# Altium PCB 4_Lay_PCB.PcbDoc (part 2 of 2)
Units mm, origin at the board's own origin, x right, y up, seen from the top; angles counter-clockwise.
Board outline 51.1 x 75.4 mm, 4 copper layers (Top, Signal Layer 1, Signal Layer 2, Bottom), stack 1.641 mm thick; 181 components, 104 nets, 542 pads, 589 vias.
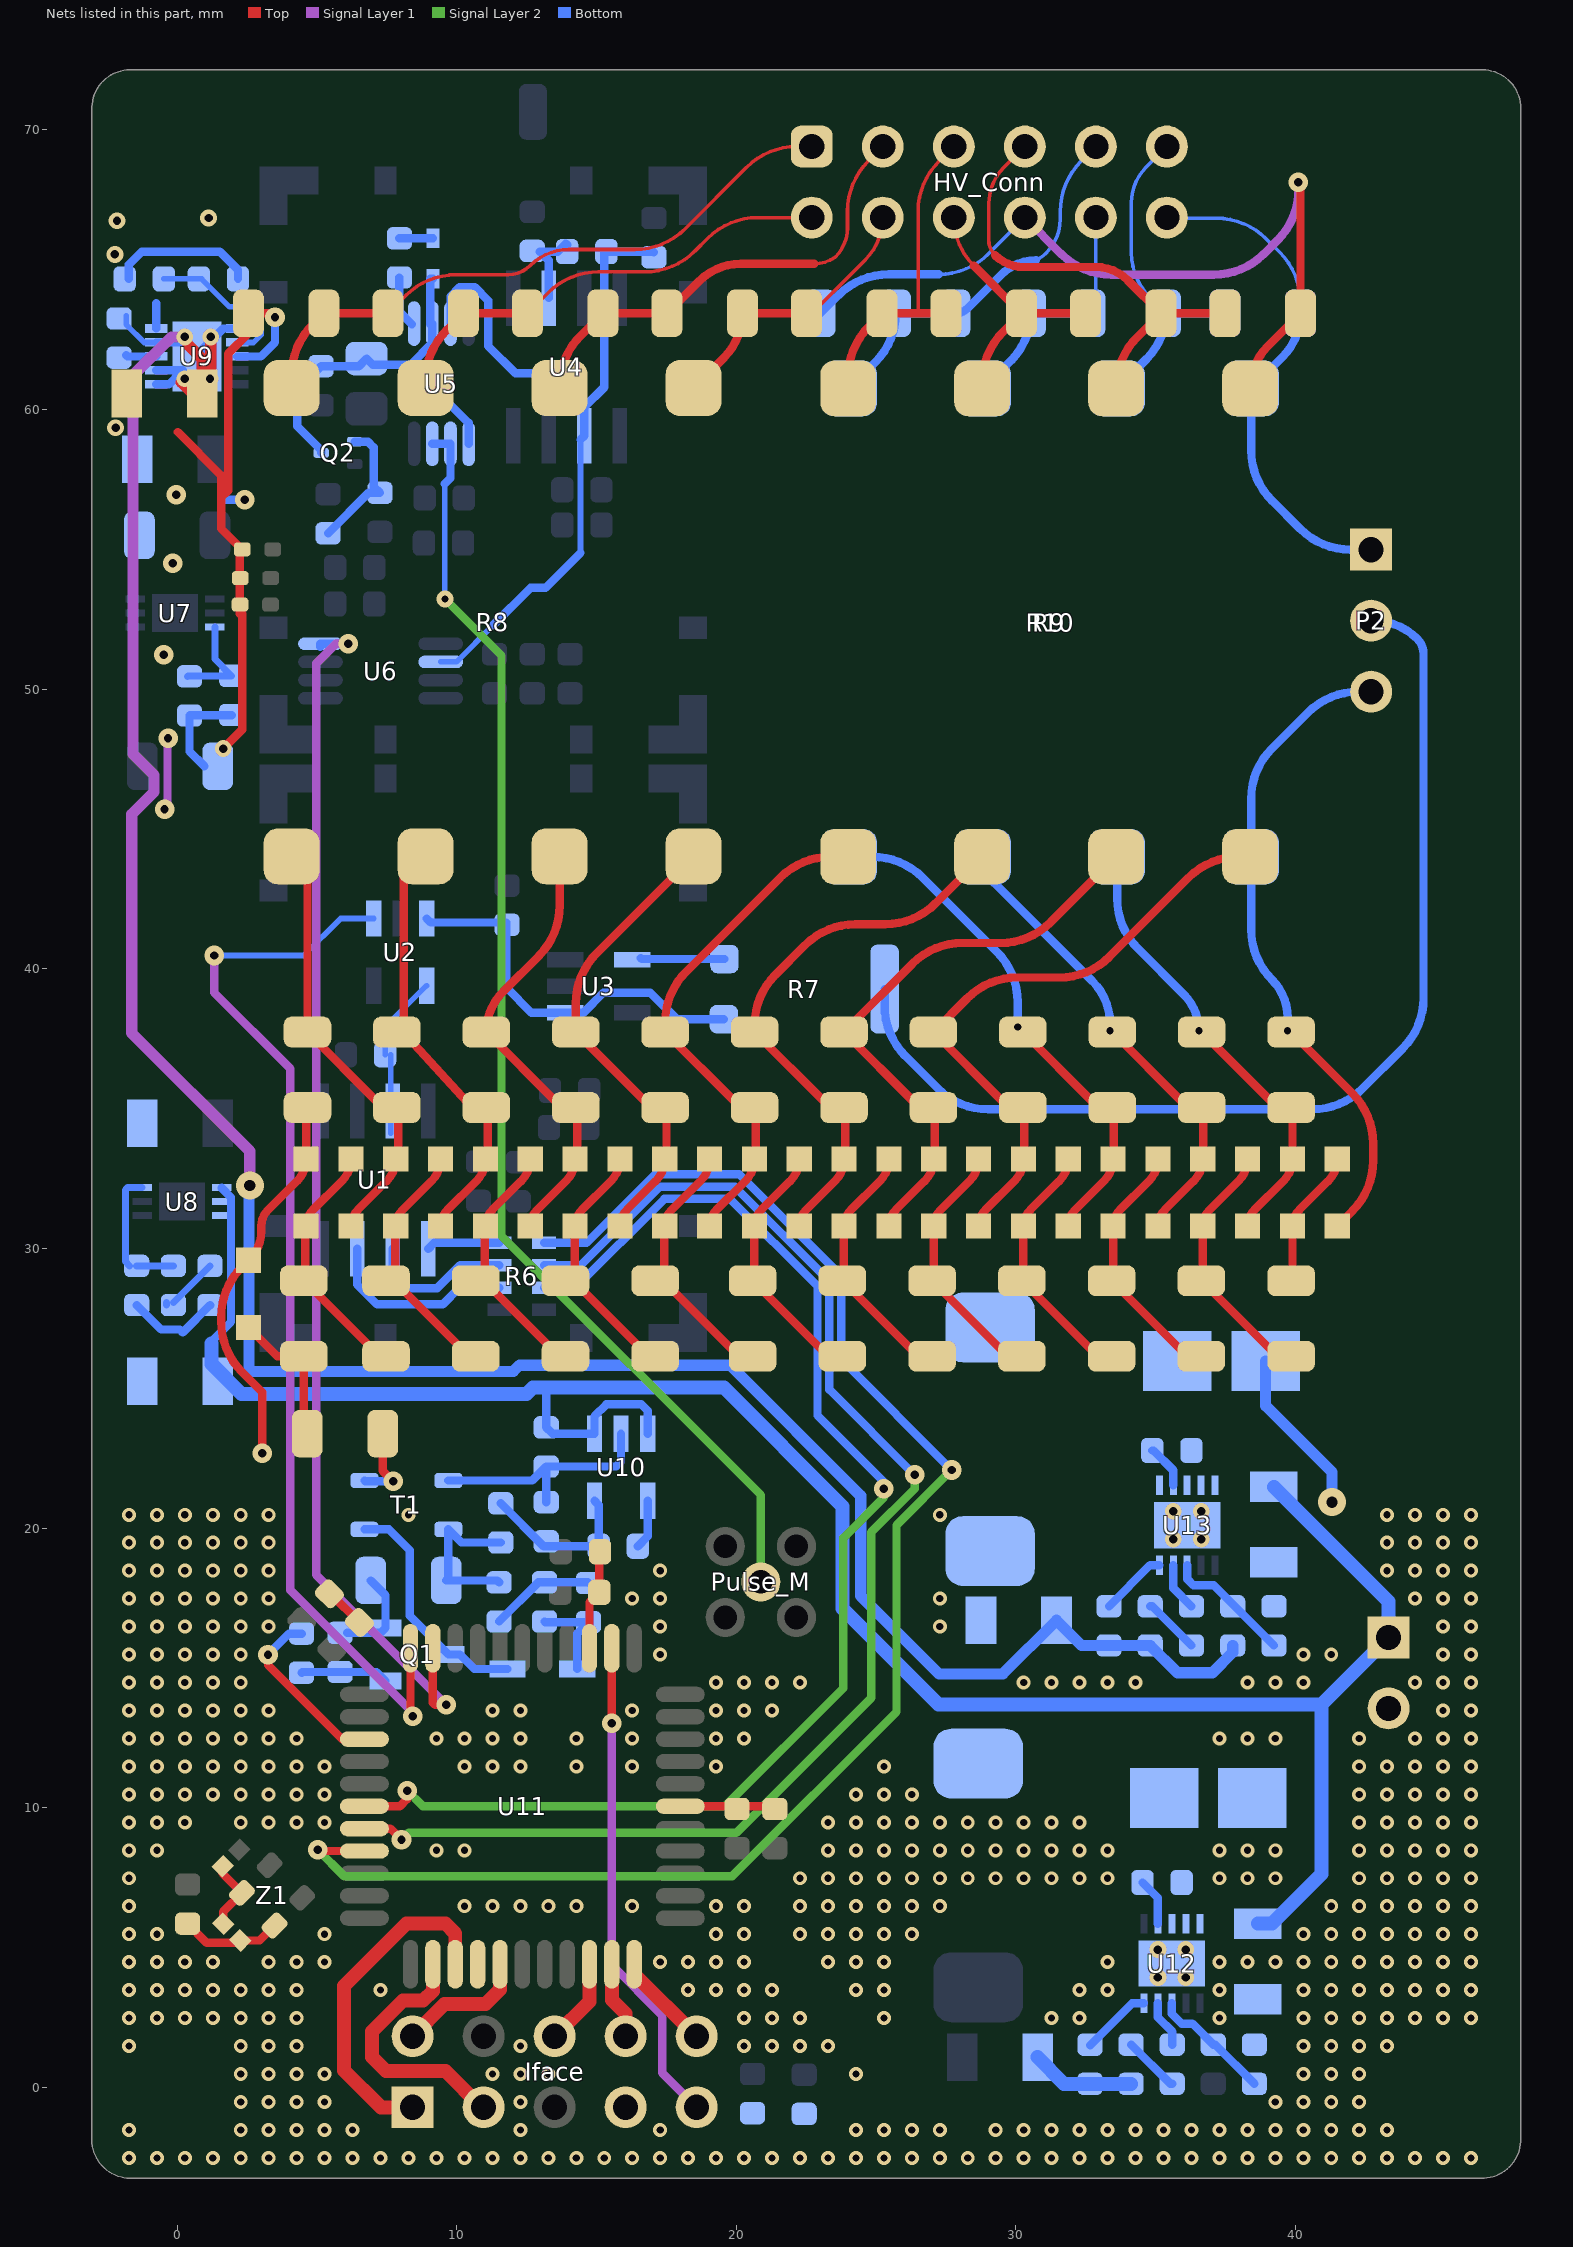
[diagram p4: the nets of this part, all layers, seen from the top]

## Via types
v1: diameter 0.5, hole 0.256, Top to Bottom, tented both sides, 495 vias
v2: diameter 0.7, hole 0.3, Top to Bottom, tented both sides, 35 vias
v3: diameter 0.6, hole 0.3, Top to Bottom, tented both sides, 29 vias
v4: diameter 0.6, hole 0.3, Top to Bottom, 12 vias
v5: diameter 0.6, hole 0.254, Top to Bottom, tented both sides, 9 vias
v6: diameter 1, hole 0.4, Top to Bottom, tented both sides, 4 vias
v7: diameter 3.7, hole 3, Top to Bottom, 3 vias
v8: diameter 1.2, hole 0.5, Top to Bottom, tented both sides, 1 vias
v9: diameter 3.6, hole 3, Top to Bottom, 1 vias

## Nets (pads, with @x,y where several pads share a name; then routed paths per layer and width w, separated by ;. In a path a pad name is that pad's centre, name@x,y a point inside that pad or via, vN(x,y) a via of type N, cw(c..) or ccw(c..) an arc to the next point about the centre after c; other vN are vias at no path point) (continued)
GND: Batt.2 C2.2 C3.2 C18.2 C31.2 C54.2 C55.2 C56.2 C57.2 C58.2 C59.2 C60.2 C61.2 C62.2 C64.2 C65.2 C66.2 C67.2 C68.2 C69.2 C70.2 C72.2 C73.2 C74.2 C76.2 C77.1 C79.2 C80.2 C81.2 D2.1 D3.2 D30.1 Iface.7 Jumper1.1 Jumper2.1 Jumper.1 L2.2 Q1.2 R5.1 R19.2 R21.1 R23.1 R26.1 R27.1 R29.2 R32.1 T1.2 U9.5 U9.8 U10.2 U11.4 U11.17 U11.25 U12.11 U13.1 Z1.2 | length 81.9
  Top w0.3: 0.025,59.2 1.575,57.65 1.575,56.85 ; C79.2@0.375,5.85 1.058,5.167 2.251,5.167 R32.1@2.251,5.249 2.949,5.249 Z1.2@3.485,5.785 ; v3(1.65,47.875) 2.33,48.555 2.33,52.698 2.243,52.698 2.243,53.975 2.243,54.913 Jumper1.1@2.33,55 2.323,55 1.575,55.748 1.575,56.85 ; D2.1@2.55,29.575 2.319,29.344 ccw(c4.115,27.548) 1.575,27.548 1.575,27.377 ccw(c4.115,27.377) 2.319,25.581 3.05,24.85 v2(3.05,22.676) ; D2.1@2.575,29.575 ccw(c1.522,30.627) 3.011,30.627 3.011,30.8 cw(c3.816,30.8) 3.247,31.369 4.287,32.409 ccw(c3.496,33.2) D3.2@4.614,33.2 4.614,34.825 cw(c4.614,35.282) C18.2@4.291,34.959 ; v2(3.5,63.303) 3.5,63.425 3.486,63.439 C31.2@2.55,63.439 2.55,62.725 1.823,61.998 1.823,57.098 1.575,56.85 ; C67.2@5.445,17.647 5.495,17.647 C68.2@6.52,16.622 ; U11.25@14.746,15.7 14.746,17.348 C66.2@15.1,17.702 15.1,19.127 C65.2@15.125,19.152 ; U11.17@17.996,10.05 21.277,10.05 C69.2@21.375,9.952
  Signal Layer 1 w0.3: v2(-0.45,45.7) -0.346,45.804 -0.346,48.231 v2(-0.325,48.252)
  Bottom w0.3: R23.1@-1.725,64.675 -1.725,65.188 -1.263,65.65 1.525,65.65 2.175,65 C61.2@2.175,64.675 ; C58.2@-1.447,27.974 -0.573,27.1 0.097,27.1 0.2,26.997 R21.1@1.178,27.974 ; U9.5@-0.746,62.9 -0.746,63.804 ; C3.2@0.973,47.244 0.443,47.774 R19.2@0.443,49.059 0.459,49.075 C55.2@1.95,49.075 ; 1.575,56.85 1.651,56.774 v2(2.425,56.774) v2@2.483,56.774 ; U9.8@2.15,61.9 2.994,61.9 3.5,62.406 v2(3.5,63.303) ; R5.1@6.079,16.253 7.279,16.253 Q1.2@7.454,16.428 7.454,17.596 C2.2@6.925,18.125 ; T1.2@9.7,21.7 12.7,21.7 C62.2@13.2,22.2 ; C64.2@13.2,20.925 C62.2@13.2,22.2 ; U10.2@15.875,23.375 15.875,22.375 15.7,22.2 C62.2@13.2,22.2
  Bottom w0.5: C74.2@30.775,1.075 31.725,0.125 R27.1@32.65,0.125 C73.2@34.119,0.125
  other v1: -1.725,-2.525 -0.725,-2.525 0.275,-2.525 1.275,-2.525 2.275,-2.525 3.275,-2.525 4.275,-2.525 5.275,-2.525 6.275,-2.525 7.275,-2.525 8.275,-2.525 9.275,-2.525 10.275,-2.525 11.275,-2.525 12.275,-2.525 13.275,-2.525 14.275,-2.525 15.275,-2.525 16.275,-2.525 17.275,-2.525 18.275,-2.525 19.275,-2.525 20.275,-2.525 21.275,-2.525 22.275,-2.525 23.275,-2.525 24.275,-2.525 25.275,-2.525 26.275,-2.525 27.275,-2.525 28.275,-2.525 29.275,-2.525 30.275,-2.525 31.275,-2.525 32.275,-2.525 33.275,-2.525 34.275,-2.525 35.275,-2.525 36.275,-2.525 37.275,-2.525 38.275,-2.525 39.275,-2.525 40.275,-2.525 41.275,-2.525 42.275,-2.525 43.275,-2.525 44.275,-2.525 45.275,-2.525 46.275,-2.525 -1.725,-1.525 2.275,-1.525 3.275,-1.525 4.275,-1.525 5.275,-1.525 6.275,-1.525 12.275,-1.525 17.275,-1.525 24.275,-1.525 25.275,-1.525 26.275,-1.525 27.275,-1.525 29.275,-1.525 30.275,-1.525 31.275,-1.525 32.275,-1.525 33.275,-1.525 34.275,-1.525 35.275,-1.525 36.275,-1.525 37.275,-1.525 38.275,-1.525 39.275,-1.525 40.275,-1.525 41.275,-1.525 42.275,-1.525 43.275,-1.525 2.275,-0.525 3.275,-0.525 4.275,-0.525 5.275,-0.525 12.275,-0.525 39.275,-0.525 40.275,-0.525 41.275,-0.525 42.275,-0.525 2.275,0.475 3.275,0.475 4.275,0.475 5.275,0.475 11.275,0.475 12.275,0.475 13.275,0.475 24.275,0.475 40.275,0.475 41.275,0.475 42.275,0.475 -1.725,1.475 2.275,1.475 3.275,1.475 4.275,1.475 12.275,1.475 20.275,1.475 21.275,1.475 22.275,1.475 23.275,1.475 40.275,1.475 41.275,1.475 42.275,1.475 43.275,1.475 -1.725,2.475 -0.725,2.475 0.275,2.475 1.275,2.475 2.275,2.475 3.275,2.475 4.275,2.475 20.275,2.475 21.275,2.475 22.275,2.475 25.275,2.475 31.275,2.475 32.275,2.475 37.275,2.475 40.275,2.475 41.275,2.475 42.275,2.475 43.275,2.475 44.275,2.475 45.275,2.475 46.275,2.475 -1.725,3.475 -0.725,3.475 0.275,3.475 1.275,3.475 2.275,3.475 3.275,3.475 4.275,3.475 7.275,3.475 18.275,3.475 19.275,3.475 20.275,3.475 21.275,3.475 24.275,3.475 25.275,3.475 32.275,3.475 33.275,3.475 37.275,3.475 40.275,3.475 41.275,3.475 42.275,3.475 43.275,3.475 44.275,3.475 45.275,3.475 46.275,3.475 -1.725,4.475 -0.725,4.475 0.275,4.475 1.275,4.475 3.275,4.475 4.275,4.475 5.275,4.475 17.275,4.475 18.275,4.475 19.275,4.475 20.275,4.475 23.275,4.475 24.275,4.475 25.275,4.475 33.275,4.475 37.275,4.475 38.275,4.475 39.275,4.475 40.275,4.475 41.275,4.475 42.275,4.475 43.275,4.475 44.275,4.475 45.275,4.475 46.275,4.475 -1.725,5.475 -0.725,5.475 5.275,5.475 19.275,5.475 20.275,5.475 22.275,5.475 23.275,5.475 24.275,5.475 25.275,5.475 26.275,5.475 40.275,5.475 41.275,5.475 42.275,5.475 43.275,5.475 44.275,5.475 45.275,5.475 46.275,5.475 -1.725,6.475 10.275,6.475 11.275,6.475 12.275,6.475 13.275,6.475 14.275,6.475 16.275,6.475 19.275,6.475 20.275,6.475 22.275,6.475 23.275,6.475 24.275,6.475 25.275,6.475 26.275,6.475 27.275,6.475 41.275,6.475 42.275,6.475 43.275,6.475 44.275,6.475 45.275,6.475 46.275,6.475 -1.725,7.475 22.275,7.475 23.275,7.475 24.275,7.475 25.275,7.475 26.275,7.475 27.275,7.475 28.275,7.475 29.275,7.475 30.275,7.475 31.275,7.475 32.275,7.475 33.275,7.475 37.275,7.475 38.275,7.475 39.275,7.475 42.275,7.475 43.275,7.475 44.275,7.475 45.275,7.475 46.275,7.475 -1.725,8.475 -0.725,8.475 9.275,8.475 10.275,8.475 23.275,8.475 24.275,8.475 25.275,8.475 26.275,8.475 27.275,8.475 28.275,8.475 29.275,8.475 30.275,8.475 31.275,8.475 32.275,8.475 33.275,8.475 37.275,8.475 38.275,8.475 39.275,8.475 42.275,8.475 43.275,8.475 44.275,8.475 45.275,8.475 46.275,8.475 -1.725,9.475 -0.725,9.475 0.275,9.475 2.275,9.475 3.275,9.475 4.275,9.475 5.275,9.475 23.275,9.475 24.275,9.475 25.275,9.475 26.275,9.475 27.275,9.475 28.275,9.475 29.275,9.475 30.275,9.475 31.275,9.475 32.275,9.475 42.275,9.475 43.275,9.475 44.275,9.475 45.275,9.475 46.275,9.475 -1.725,10.475 -0.725,10.475 0.275,10.475 1.275,10.475 2.275,10.475 3.275,10.475 4.275,10.475 5.275,10.475 24.275,10.475 25.275,10.475 26.275,10.475 42.275,10.475 43.275,10.475 44.275,10.475 45.275,10.475 46.275,10.475 -1.725,11.475 -0.725,11.475 0.275,11.475 1.275,11.475 2.275,11.475 3.275,11.475 4.275,11.475 5.275,11.475 10.275,11.475 11.275,11.475 12.275,11.475 14.275,11.475 16.275,11.475 19.275,11.475 25.275,11.475 42.275,11.475 43.275,11.475 44.275,11.475 45.275,11.475 46.275,11.475 -1.725,12.475 -0.725,12.475 0.275,12.475 1.275,12.475 2.275,12.475 3.275,12.475 4.275,12.475 9.275,12.475 10.275,12.475 11.275,12.475 12.275,12.475 14.275,12.475 16.275,12.475 19.275,12.475 20.275,12.475 37.275,12.475 38.275,12.475 39.275,12.475 42.275,12.475 44.275,12.475 45.275,12.475 46.275,12.475 -1.725,13.475 -0.725,13.475 0.275,13.475 1.275,13.475 2.275,13.475 3.275,13.475 11.275,13.475 12.275,13.475 16.275,13.475 19.275,13.475 20.275,13.475 21.275,13.475 45.275,13.475 46.275,13.475 -1.725,14.475 -0.725,14.475 0.275,14.475 1.275,14.475 2.275,14.475 19.275,14.475 20.275,14.475 21.275,14.475 22.275,14.475 30.275,14.475 31.275,14.475 32.275,14.475 33.275,14.475 34.275,14.475 38.275,14.475 39.275,14.475 40.275,14.475 44.275,14.475 45.275,14.475 46.275,14.475 -1.725,15.475 -0.725,15.475 0.275,15.475 1.275,15.475 2.275,15.475 17.275,15.475 40.275,15.475 41.275,15.475 45.275,15.475 46.275,15.475 -1.725,16.475 -0.725,16.475 0.275,16.475 1.275,16.475 2.275,16.475 3.275,16.475 17.275,16.475 27.275,16.475 45.275,16.475 46.275,16.475 -1.725,17.475 -0.725,17.475 0.275,17.475 1.275,17.475 2.275,17.475 3.275,17.475 16.275,17.475 17.275,17.475 27.275,17.475 44.275,17.475 45.275,17.475 46.275,17.475 -1.725,18.475 -0.725,18.475 0.275,18.475 1.275,18.475 2.275,18.475 3.275,18.475 17.275,18.475 43.275,18.475 44.275,18.475 45.275,18.475 46.275,18.475 -1.725,19.475 -0.725,19.475 0.275,19.475 1.275,19.475 2.275,19.475 3.275,19.475 43.275,19.475 44.275,19.475 45.275,19.475 46.275,19.475 -1.725,20.475 -0.725,20.475 0.275,20.475 1.275,20.475 2.275,20.475 3.275,20.475 8.275,20.475 27.275,20.475 43.275,20.475 44.275,20.475 45.275,20.475 46.275,20.475
  other v2: -0.475,51.225 -0.15,54.5 -0.025,56.95
  other v3: -2.2,59.35 -2.225,65.55 -2.15,66.75 1.125,66.85
  other v4: 35.075,3.925 36.075,3.925 35.075,4.925 36.075,4.925
MAXPULSELEVEL: Pulse_M.1 U5.6 U5.7 | length 46.1
  Signal Layer 2 w0.3: v5(9.575,53.225) 11.6,51.2 11.6,30.45 20.875,21.175 Pulse_M.1@20.875,18.075
  Bottom w0.2: v5(9.575,53.225) 9.575,57.35
  Bottom w0.3: U5.7@9.125,58.775 U5.6@9.775,58.775 9.775,57.55 9.575,57.35
MCU_CONTROL1: Iface.2 U11.5 | length 4.7
  Top w0.5: Iface.2@8.42,1.825 9.57,2.975 11.025,2.975 11.546,3.496 U11.5@11.546,4.4
MCU_CONTROL2: Iface.3 U11.2 | length 9.4
  Top w0.5: U11.2@9.146,4.4 9.146,3.446 8.8,3.1 8.075,3.1 6.975,2 6.975,1.075 7.475,0.575 9.6,0.575 10.89,-0.715 Iface.3@10.96,-0.715
MCU_CONTROL3: Iface.1 U11.3 | length 12.2
  Top w0.5: Iface.1@8.42,-0.715 7.29,-0.715 5.975,0.6 5.975,3.625 8.2,5.85 9.6,5.85 9.946,5.504 U11.3@9.946,4.4
NEGATIVE_V: C59.1 C77.2 C78.2 D31.1 R22.1 R30.1 R31.1 U9.1 U9.2 U9.4 U9.6 U9.11 U13.11 | length 100.9
  Top w0.4: v3@0.15,60.975 0.55,60.575 C59.1@0.9,60.575 0.9,61.8 ; 0.4,62.3 0.9,61.8 ; C59.1@1.025,60.7 C59.1@1.15,60.575 ; v3(1.2,62.6) 1.2,61.5 0.9,61.8
  Signal Layer 1 w0.4: v3@0.025,62.6 -0.2,62.6 -1.573,61.227 -1.573,47.68 -0.823,46.93 -0.823,46.327 -1.625,45.525 -1.625,37.7 2.6,33.475 v6(2.6,32.252)
  Bottom w0.2: R22.1@-1.825,63.35 -1.825,63.05 -1.175,62.4 U9.4@-0.746,62.4
  Bottom w0.3: U9.1@-0.746,60.9 -0.298,60.9 U9.11@0.089,61.286 ; U9.2@-0.746,61.4 U9.11@0.202,61.4 ; U9.4@-0.746,62.4 U9.11@0.202,62.4 ; U9.11@0.702,61.952 1.65,62.9 U9.6@2.15,62.9
  Bottom w0.4: v6@2.575,31.955 2.575,25.594 12.019,25.594 12.25,25.825 19.775,25.825 24.448,21.152 24.448,17.577 27.25,14.775 29.525,14.775 C77.2@31.45,16.7 32.35,15.8 R31.1@33.325,15.8 C78.2@34.8,15.8 35.775,14.825 37.025,14.825 37.75,15.55 R30.1@37.75,15.8 ; D31.1@38.925,25.975 38.925,24.375 41.3,22 v6(41.3,20.925)
  other v3: 0.275,61.1 1.175,61.1 0.275,62.6
  other v4: 35.625,19.6 36.625,19.6 35.625,20.6 36.625,20.6
NetC1_1: C1.1 D1.A R1.1 | length 3.4
  Bottom w0.3: R1.1@13.14,16.658 13.165,16.633 C1.1@14.715,16.633 14.315,16.233 D1.A@14.315,14.958
NetC1_2: C1.2 R1.2 R2.1 | length 3.8
  Bottom w0.3: R2.1@11.515,16.658 12.915,18.058 R1.2@13.14,18.058 14.69,18.058 C1.2@14.715,18.033
NetC2_1: C2.1 R2.2 R3.1 T1.1 | length 5.8
  Bottom w0.3: R2.2@11.515,18.058 11.448,18.125 C2.1@9.625,18.125 9.7,18.2 T1.1@9.7,19.95 10.167,19.483 R3.1@11.575,19.483
NetC4_2: C4.2 U1.7 U2.4 | length 5.9
  Bottom w0.2: C4.2@7.438,36.925 7.438,37.913 U2.4@8.925,39.4 ; U1.7@7.635,34.114 C4.2@7.635,36.925
NetC5_1: C5.1 C6.2 D2.2 | length 5.2
  Top w0.3: D2.2@2.55,27.175 3.577,26.148 C6.2@4.535,26.148 4.535,23.49 C5.1@4.65,23.375
NetC6_1: C6.1 C7.2 D3.1 D4.2 | length 8.6
  Top w0.3: C6.1@4.535,28.848 C7.2@7.235,26.148 ; C6.1@4.586,28.97 D3.1@4.586,30.8 ; D3.1@4.614,30.8 cw(c5.419,30.8) 4.85,31.369 5.89,32.409 ccw(c5.099,33.2) D4.2@6.218,33.2
NetC7_1: C7.1 C8.2 D5.1 D6.2 | length 8.6
  Top w0.3: C7.1@7.745,28.848 C8.2@10.445,26.148 ; C7.1@7.795,28.97 D5.1@7.795,30.8 ; D5.1@7.821,30.8 cw(c8.626,30.8) 8.057,31.369 9.097,32.409 ccw(c8.306,33.2) D6.2@9.424,33.2
NetC8_1: C8.1 C9.2 D7.1 D8.2 | length 8.6
  Top w0.3: C8.1@10.954,28.848 C9.2@13.654,26.148 ; C8.1@11.005,28.97 D7.1@11.005,30.8 ; D7.1@11.028,30.8 cw(c11.833,30.8) 11.264,31.369 12.304,32.409 ccw(c11.513,33.2) D8.2@12.631,33.2
NetC9_1: C9.1 C10.2 D9.1 D10.2 | length 8.6
  Top w0.3: C9.1@14.164,28.848 C10.2@16.864,26.148 ; C9.1@14.214,28.97 D9.1@14.214,30.8 ; D9.1@14.235,30.8 cw(c15.039,30.8) 14.47,31.369 15.51,32.409 ccw(c14.72,33.2) D10.2@15.838,33.2
NetC10_1: C10.1 C11.2 D11.1 D12.2 | length 8.6
  Top w0.3: C10.1@17.374,28.848 C11.2@20.074,26.148 ; C10.1@17.424,28.97 D11.1@17.424,30.8 ; D11.1@17.441,30.8 cw(c18.246,30.8) 17.677,31.369 18.717,32.409 ccw(c17.926,33.2) D12.2@19.045,33.2
NetC11_1: C11.1 C12.2 D13.1 D14.2 | length 8.6
  Top w0.3: C11.1@20.583,28.848 C12.2@23.283,26.148 ; C11.1@20.634,28.97 D13.1@20.634,30.8 ; D13.1@20.648,30.8 cw(c21.453,30.8) 20.884,31.369 21.924,32.409 ccw(c21.133,33.2) D14.2@22.251,33.2
NetC12_1: C12.1 C13.2 D15.1 D16.2 | length 8.6
  Top w0.3: C12.1@23.793,28.848 C13.2@26.493,26.148 ; C12.1@23.843,28.97 D15.1@23.843,30.8 ; D15.1@23.855,30.8 cw(c24.66,30.8) 24.091,31.369 25.131,32.409 ccw(c24.34,33.2) D16.2@25.458,33.2
NetC13_1: C13.1 C14.2 D17.1 D18.2 | length 8.6
  Top w0.3: C13.1@27.002,28.848 C14.2@29.702,26.148 ; C13.1@27.053,28.97 D17.1@27.053,30.8 ; D17.1@27.062,30.8 cw(c27.866,30.8) 27.297,31.369 28.337,32.409 ccw(c27.547,33.2) D18.2@28.665,33.2
NetC14_1: C14.1 C15.2 D19.1 D20.2 | length 8.6
  Top w0.3: C14.1@30.212,28.848 C15.2@32.912,26.148 ; C14.1@30.263,28.97 D19.1@30.263,30.8 ; D19.1@30.268,30.8 cw(c31.073,30.8) 30.504,31.369 31.544,32.409 ccw(c30.753,33.2) D20.2@31.872,33.2
NetC15_1: C15.1 C16.2 D21.1 D22.2 | length 8.6
  Top w0.3: C15.1@33.422,28.848 C16.2@36.122,26.148 ; C15.1@33.472,28.97 D21.1@33.472,30.8 ; D21.1@33.475,30.8 cw(c34.28,30.8) 33.711,31.369 34.751,32.409 ccw(c33.96,33.2) D22.2@35.078,33.2
NetC16_1: C16.1 C17.2 D23.1 D24.2 | length 9.3
  Top w0.3: D24.2@38.285,33.2 cw(c37.167,33.2) 37.958,32.409 36.918,31.369 ccw(c37.487,30.8) D23.1@36.682,30.8 36.682,28.97 cw(c36.509,28.97) C16.1@36.631,28.848 39.331,26.148 C17.2@39.841,26.148
NetC17_1: C17.1 D25.1 D26.2 | length 4.9
  Top w0.3: C17.1@39.841,28.848 ccw(c39.726,28.963) 39.889,28.963 D25.1@39.889,30.8 cw(c40.693,30.8) 40.124,31.369 41.164,32.409 ccw(c40.374,33.2) D26.2@41.492,33.2
NetC18_1: C18.1 C19.2 D4.1 D5.2 R8.8 | length 14.8
  Top w0.3: R8.8@4.096,44.022 4.662,43.456 C18.1@4.662,37.738 C19.2@7.172,35.227 ; D4.1@6.218,30.8 cw(c7.023,30.8) 6.453,31.369 7.494,32.409 ccw(c6.703,33.2) D5.2@7.821,33.2 ; D5.2@7.908,33.2 C19.2@7.908,34.923
NetC19_1: C19.1 C20.2 D6.1 D7.2 R8.7 | length 14.3
  Top w0.3: R8.7@8.604,43.739 8.11,43.245 8.11,37.713 C20.2@10.371,35.227 ; D6.1@9.424,30.8 cw(c10.229,30.8) 9.66,31.369 10.7,32.409 ccw(c9.909,33.2) D7.2@11.028,33.2 ; D7.2@11.106,33.2 C20.2@11.106,34.923
NetC20_1: C20.1 C21.2 D8.1 D9.2 R8.6 | length 15.4
  Top w0.3: D8.1@12.631,30.8 cw(c13.436,30.8) 12.867,31.369 13.907,32.409 ccw(c13.116,33.2) D9.2@14.235,33.2 ; C21.2@13.569,35.227 C20.1@11.058,37.738 cw(c13.099,37.738) 11.656,39.181 12.935,40.46 ccw(c11.139,42.256) 13.679,42.256 R8.6@13.679,44.022 ; D9.2@14.304,33.2 C21.2@14.304,34.923
NetC21_1: C21.1 C22.2 D10.1 D11.2 R8.5 | length 16.2
  Top w0.3: D10.1@15.838,30.8 cw(c16.643,30.8) 16.074,31.369 17.114,32.409 ccw(c16.323,33.2) D11.2@17.441,33.2 ; C22.2@16.767,35.227 C21.1@14.256,37.738 14.256,38.755 cw(c16.796,38.755) 15,40.551 R8.5@18.471,44.022 ; D11.2@17.502,33.2 C22.2@17.502,34.923
NetC22_1: C22.1 C23.2 D12.1 D13.2 R9.8 | length 18
  Top w0.3: D12.1@19.045,30.8 cw(c19.85,30.8) 19.28,31.369 20.321,32.409 ccw(c19.53,33.2) D13.2@20.648,33.2 ; C23.2@19.965,35.227 C22.1@17.454,37.738 17.454,38.095 cw(c19.994,38.095) 18.198,39.891 21.571,43.264 cw(c23.367,41.468) 23.367,44.008 R9.8@24,44.008 ; D13.2@20.7,33.2 C23.2@20.7,34.923
NetC23_1: C23.1 C24.2 D14.1 D15.2 R9.7 | length 19.4
  Top w0.3: D14.1@22.251,30.8 cw(c23.056,30.8) 22.487,31.369 23.527,32.409 ccw(c22.736,33.2) D15.2@23.855,33.2 ; C24.2@23.163,35.227 C23.1@20.652,37.738 20.652,37.991 cw(c23.192,37.991) 21.396,39.787 22.46,40.851 cw(c24.256,39.055) 24.256,41.595 25.327,41.595 ccw(c25.327,44.135) 27.123,42.339 R9.7@28.792,44.008 ; D15.2@23.898,33.2 C24.2@23.898,34.923
NetC24_1: C24.1 C25.2 D16.1 D17.2 R9.6 | length 20.4
  Top w0.3: D16.1@25.458,30.8 cw(c26.263,30.8) 25.694,31.369 26.734,32.409 ccw(c25.943,33.2) D17.2@27.062,33.2 ; C25.2@26.361,35.227 C24.1@23.851,37.738 26.294,40.181 cw(c28.09,38.385) 28.09,40.925 29.449,40.925 ccw(c29.449,43.465) 31.245,41.669 R9.6@33.584,44.008 ; D17.2@27.096,33.2 C25.2@27.096,34.923
NetC25_1: C25.1 C26.2 D18.1 D19.2 R9.5 | length 21.9
  Top w0.3: D18.1@28.665,30.8 cw(c29.47,30.8) 28.901,31.369 29.941,32.409 ccw(c29.15,33.2) D19.2@30.268,33.2 ; C26.2@29.559,35.227 C25.1@27.049,37.738 28.257,38.946 cw(c30.053,37.15) 30.053,39.69 31.55,39.69 ccw(c31.55,42.23) 33.346,40.434 36.176,43.264 cw(c37.972,41.468) 37.972,44.008 R9.5@38.375,44.008 ; D19.2@30.294,33.2 C26.2@30.294,34.923
NetC26_1: C26.1 C27.2 D20.1 D21.2 R10.5 | length 17.7
  Top w0.3: C26.1@30.247,37.738 C27.2@32.757,35.227 ; D20.1@31.872,30.8 cw(c32.677,30.8) 32.107,31.369 33.148,32.409 ccw(c32.357,33.2) D21.2@33.475,33.2 ; D21.2@33.492,33.2 C27.2@33.492,34.923
  Bottom w0.3: R10.5@24.035,44.008 24.865,44.008 cw(c24.865,41.468) 26.661,43.264 29.318,40.607 cw(c27.522,38.811) 30.062,38.811 v5(30.062,37.912)
NetC27_1: C27.1 C28.2 D22.1 D23.2 R10.6 | length 16.2
  Top w0.3: C27.1@33.445,37.738 C28.2@35.955,35.227 ; D22.1@35.078,30.8 cw(c35.883,30.8) 35.314,31.369 36.354,32.409 ccw(c35.563,33.2) D23.2@36.682,33.2 ; D23.2@36.691,33.2 C28.2@36.691,34.923
  Bottom w0.3: R10.6@28.826,44.008 ccw(c30.136,44.008) 29.21,43.082 32.735,39.556 cw(c31.218,38.039) 33.364,38.039 v5(33.364,37.785)
NetC28_1: C28.1 C29.2 D24.1 D25.2 R10.7 | length 16.3
  Top w0.3: C28.1@36.643,37.738 39.153,35.227 ccw(c39.889,35.963) 39.889,34.923 D25.2@39.889,33.2 cw(c38.77,33.2) 39.561,32.409 38.521,31.369 ccw(c39.09,30.8) D24.1@38.285,30.8
  Bottom w0.3: R10.7@33.618,44.008 33.618,42.52 ccw(c36.158,42.52) 34.362,40.724 36,39.086 cw(c34.699,37.785) v5(36.539,37.785)
NetC29_1: C29.1 D26.1 P2.3 R10.8 | length 23.4
  Top w0.3: C29.1@39.841,37.738 42.031,35.548 cw(c40.235,33.752) 42.775,33.752 42.775,33.135 cw(c40.235,33.135) 42.031,31.339 D26.1@41.492,30.8
  Bottom w0.3: v5(39.714,37.785) 39.714,38.262 ccw(c37.801,38.262) 39.154,39.615 cw(c40.95,41.411) 38.41,41.411 R10.8@38.41,44.008 38.41,46.082 cw(c40.95,46.082) 39.154,47.878 40.441,49.166 cw(c42.237,47.37) 42.237,49.91 P2.3@42.7,49.91
NetC55_1: C55.1 R19.1 U7.3 | length 3.6
  Bottom w0.25: R19.1@0.368,50.459 0.384,50.475 C55.1@1.95,50.475 1.35,51.075 U7.3@1.35,52.225
NetC58_1: C58.1 R20.2 U8.3 | length 4.7
  Bottom w0.25: C58.1@-1.697,29.374 -1.852,29.529 -1.852,32.098 -1.775,32.175 U8.3@-1.25,32.175 ; C58.1@-1.447,29.374 R20.2@-0.135,29.374
NetC61_1: C61.1 R23.2 U9.7 | length 5.6
  Bottom w0.2: R23.2@-0.475,64.675 C61.1@0.775,64.675 0.875,64.675 1.875,63.675 2.625,63.675 2.923,63.377 2.923,63.064 3,62.987 3,62.675 2.725,62.4 U9.7@2.15,62.4
NetC63_1: C63.1 U10.4 | length 1.8
  Bottom w0.3: C63.1@16.475,19.35 16.825,19.7 U10.4@16.825,20.975
NetC63_2: C63.2 C64.1 R3.2 U10.5 | length 5.8
  Bottom w0.3: R3.2@11.575,20.883 13.108,19.35 C63.2@15.075,19.35 15.075,20.825 U10.5@14.925,20.975
NetC71_1: C71.1 U12.2 | length 1.7
  Bottom w0.3: C71.1@34.525,7.325 35.075,6.775 U12.2@35.075,5.85
NetC71_2: C71.2 D30.2 L1.1 U12.3
NetC73_1: C73.1 R24.1 | length 2
  Bottom w0.3: C73.1@34.119,1.525 35.519,0.125 R24.1@35.588,0.125
NetC75_1: C75.1 U13.2 | length 1.6
  Bottom w0.3: C75.1@34.875,22.775 34.917,22.775 35.625,22.067 U13.2@35.625,21.525
NetC75_2: C75.2 D31.2 L2.1 U13.3
NetC78_1: C78.1 R28.1 | length 2.1
  Bottom w0.3: C78.1@34.8,17.2 34.875,17.2 R28.1@36.275,15.8
NetD1_K: D1.K Q1.3 T1.4 | length 8.6
  Bottom w0.3: T1.4@6.7,19.95 7.575,19.95 8.325,19.2 8.325,16.857 Q1.3@9.704,15.478 10.11,15.478 10.63,14.958 D1.K@11.815,14.958
NetD28_1: D28.1 R11.2 | length 1.2
  Bottom w0.3: R11.2@7.95,66.125 D28.1@9.15,66.125
NetP2_2: P2.2 R7.1 | length 38.6
  Bottom w0.3: R7.1@25.3,39.275 25.3,38.677 ccw(c27.84,38.677) 26.044,36.881 27.206,35.719 ccw(c29.002,37.515) 29.002,34.975 40.598,34.975 ccw(c40.598,37.515) 42.394,35.719 43.831,37.156 ccw(c42.035,38.952) 44.575,38.952 44.575,51.257 ccw(c43.807,51.257) 44.35,51.8 ccw(c42.781,50.231) 42.781,52.45 P2.2@42.7,52.45
NetQ1_1: Q1.1 R4.2 R5.2 | length 3.2
  Bottom w0.3: R4.2@4.45,14.825 4.478,14.853 R5.2@5.829,14.853 7.129,14.853 Q1.1@7.454,14.528
NetQ2_1: Q2.1 R13.1 R16.1 | length 4.9
  Bottom w0.3: R16.1@5.4,55.575 6.85,57.025 R13.1@7.25,57.025 7.025,57.25 7.025,58.65 6.825,58.85 Q2.1@6.35,58.85
NetR6_1: R6.1 U1.1 | length 2.6
  Bottom w0.3: U1.1@8.98,29.986 9.194,30.2 R6.1@11.525,30.2
NetR6_2: R6.2 U1.2 | length 5.3
  Bottom w0.3: U1.2@7.71,29.986 7.71,29.075 8.21,28.575 9.3,28.575 10.125,29.4 R6.2@11.525,29.4
NetR6_3: R6.3 U1.3 | length 6.9
  Bottom w0.3: U1.3@6.44,29.986 6.44,28.71 7.15,28 9.5,28 10.1,28.6 R6.3@11.525,28.6
NetR7_3: R7.3 U3.4 | length 3
  Bottom w0.3: U3.4@16.575,40.385 16.61,40.35 R7.3@19.575,40.35
NetR11_1: R11.1 U5.1 | length 1.9
  Bottom w0.3: R11.1@7.95,64.725 7.95,63.5 U5.1@8.4,63.05
NetR12_2: R12.2 R14.2 U4.2 | length 2.9
  Bottom w0.3: U4.2@13.29,63.989 13.29,65.335 12.975,65.65 13.615,65.65 13.89,65.925 cw(c13.89,65.84) R14.2@13.95,65.9
NetR20_1: R20.1 R21.2 | length 1.9
  Bottom w0.25: R20.1@-0.385,27.974 R20.1@-0.385,28.062 ; R20.1@-0.135,28.062 R21.2@1.178,29.374
NetR22_2: R22.2 U9.3 | length 1.1
  Bottom w0.3: R22.2@-1.825,61.95 -1.775,61.9 U9.3@-0.746,61.9
NetR24_2: R24.2 U12.9 | length 1.7
  Bottom w0.3: U12.9@35.075,3 35.075,2.5 35.588,1.987 R24.2@35.588,1.525
NetR25_1: R25.1 R26.2 U12.8 | length 4.4
  Bottom w0.3: U12.8@35.575,3 35.575,2.625 35.925,2.275 36.306,2.275 R25.1@37.056,1.525 37.125,1.525 R26.2@38.525,0.125
NetR27_2: R27.2 U12.10 | length 2.5
  Bottom w0.3: R27.2@32.65,1.5 34.15,3 U12.10@34.575,3
NetR28_2: R28.2 U13.9 | length 1.7
  Bottom w0.3: U13.9@35.625,18.675 35.625,17.85 R28.2@36.275,17.2
NetR29_1: R29.1 R30.2 U13.8 | length 4.6
  Bottom w0.3: U13.8@36.125,18.675 36.125,18.175 36.35,17.95 37.075,17.95 R29.1@39.225,15.8
NetR31_2: R31.2 U13.10 | length 2.4
  Bottom w0.3: R31.2@33.325,17.2 34.8,18.675 U13.10@35.125,18.675
NetR32_2: R32.2 R33.2 Z1.1 | length 2.6
  Top w0.3: R33.2@1.624,7.899 1.624,7.646 Z1.1@2.318,6.952 1.649,6.283 R32.2@1.649,5.851
PEAKVOLTAGE: C44.1 D28.2 Q2.3 R15.1 U5.2 U5.5 | length 14.4
  Bottom w0.3: Q2.3@5.15,58.45 5.15,58.55 4.3,59.4 4.3,60.7 R15.1@5.15,61.55 6.5,61.55 C44.1@6.775,61.825 7,61.6 8.35,61.6 ; U5.2@9.05,63.05 9.05,64.675 D28.2@9.15,64.675 ; U5.2@9.125,63.075 9.125,62.375 8.35,61.6 ; U5.5@10.425,58.775 10.425,59.525 8.35,61.6
PREAMPSIGOUT: R14.1 R35.1 U4.6 U5.3 U6.2 | length 28.2
  Bottom w0.2: U6.2@9.425,50.975 9.989,50.975 11.3,52.286 ; 14.425,54.875 U4.6@14.425,58.926
  Bottom w0.3: U5.3@9.775,63.075 9.775,64.05 10.1,64.375 10.65,64.375 11.125,63.9 11.125,62.275 12.1,61.3 13.191,61.3 U4.6@14.56,59.931 ; 11.3,52.286 12.639,53.625 13.175,53.625 14.425,54.875 ; U4.6@14.425,58.926 U4.6@14.56,59.061 U4.6@14.56,59.931 ; R35.1@17.05,65.625 17.025,65.65 R14.1@15.35,65.65 15.275,65.65 15.275,60.8 14.56,60.085 U4.6@14.56,59.931
PULSE: R4.1 U11.36 | length 6.4
  Top w0.3: v2(3.25,15.475) 3.25,15.1 5.9,12.45 U11.36@6.696,12.45
  Bottom w0.3: v2(3.25,15.475) 4,16.225 R4.1@4.45,16.225
PULSESENS: U6.8 U11.32 | length 44.2
  Top w0.3: U11.32@9.146,15.7 9.146,13.754 9.224,13.676 v2(9.625,13.676)
  Signal Layer 1 w0.3: v2(6.125,51.625) 5.675,51.625 4.975,50.925 4.975,18.326 v2(9.625,13.676)
  Bottom w0.3: U6.8@5.125,51.523 U6.8@5.125,51.625 v2(6.125,51.625)
PUMP: C5.2 T1.3 | length 2.9
  Top w0.3: C5.2@7.35,23.375 7.35,22.05 v2(7.725,21.675)
  Bottom w0.3: T1.3@6.7,21.7 6.725,21.675 v2(7.725,21.675)
TCK: Iface.10 U11.11 | length 3.5
  Top w0.5: U11.11@16.346,4.4 16.346,4.059 Iface.10@18.58,1.825
TDI: Iface.6 U11.9 | length 3.1
  Top w0.5: Iface.6@13.5,1.825 14.746,3.071 U11.9@14.746,4.4
TDO: Iface.9 U11.24 | length 17.7
  Top w0.3: v2(15.546,13.025) U11.24@15.546,15.7
  Signal Layer 1 w0.3: v2(15.546,13.025) 15.546,4.379 17.35,2.575 17.35,0.515 Iface.9@18.58,-0.715
TMS: Iface.8 U11.10 | length 2.8
  Top w0.5: U11.10@15.546,4.4 15.546,3.129 16.04,2.635 Iface.8@16.04,1.825
UP1: C31.1 C32.2 HV_Conn.1 R8.4 | length 22.5
  Top w0.127: C32.2@7.539,63.439 8.181,64.081 cw(c9.978,62.285) 9.978,64.825 11.84,64.825 ccw(c11.84,65.935) 12.625,65.15 cw(c14.013,63.762) 14.013,65.725 16.373,65.725 ccw(c16.373,68.265) 18.169,66.469 20.364,68.664 cw(c22.16,66.868) 22.16,69.408 HV_Conn.1@22.696,69.408
  Top w0.3: R8.4@4.096,60.772 4.096,61.232 cw(c6.636,61.232) 4.84,63.028 C31.1@5.25,63.439 C32.2@7.539,63.439
UP2: C32.1 C33.2 HV_Conn.2 R8.3 | length 16.7
  Top w0.127: C33.2@12.529,63.439 13.271,64.181 cw(c15.067,62.385) 13.882,64.632 cw(c15.067,62.385) 15.067,64.925 16.723,64.925 ccw(c16.723,67.465) 18.519,65.669 18.974,66.124 cw(c20.77,64.328) 20.77,66.868 HV_Conn.2@22.696,66.868
  Top w0.3: R8.3@8.887,60.772 8.887,61.035 cw(c11.427,61.035) 9.631,62.831 C32.1@10.239,63.439 C33.2@12.529,63.439
UP3: C33.1 C34.2 HV_Conn.3 R8.2 | length 17.2
  Top w0.127: 22.792,65.217 ccw(c22.792,66.518) 23.534,65.449 ccw(c22.468,66.515) 23.975,66.515 23.975,67.095 cw(c26.515,67.095) 24.719,68.891 HV_Conn.3@25.236,69.408 cw(c24.623,69.408) HV_Conn.3@25.056,68.974
  Top w0.3: R8.2@13.679,60.772 13.679,60.837 cw(c16.219,60.837) 14.423,62.633 C33.1@15.229,63.439 C34.2@17.518,63.439 18.688,64.609 cw(c20.156,63.14) 20.156,65.217 22.792,65.217
UP4: C34.1 C35.2 HV_Conn.4 R8.1 | length 10.1
  Top w0.127: C35.2@22.83,63.572 24.607,65.35 ccw(c23.09,66.868) HV_Conn.4@25.236,66.868
  Top w0.3: R8.1@18.471,60.772 19.567,61.869 ccw(c17.997,63.439) C34.1@20.218,63.439 C35.2@22.507,63.439 ccw(c22.507,63.895) C35.2@22.83,63.572
UP5: C35.1 C36.2 HV_Conn.5 R9.4 | length 11.9
  Top w0.127: 26.425,63.439 ccw(c26.244,63.62) 26.5,63.62 26.5,67.08 cw(c29.04,67.08) 27.244,68.876 HV_Conn.5@27.776,69.408
  Top w0.3: R9.4@24,60.758 24,61.18 cw(c26.54,61.18) 24.744,62.976 C35.1@25.207,63.439 26.425,63.439 C36.2@27.496,63.439 C36.2@27.377,63.558
UP6: C36.1 C37.2 HV_Conn.6 R9.3 | length 9.8
  Top w0.127: HV_Conn.6@27.776,66.868 ccw(c30.211,66.868) 28.093,65.667 ccw(c30.211,66.868) 28.16,65.555 ccw(c30.211,66.868) 28.489,65.146
  Top w0.3: 28.489,65.146 C36.1@30.196,63.439 ; R9.3@28.792,60.758 28.792,60.982 cw(c31.332,60.982) 29.536,62.778 C36.1@30.196,63.439 ; C37.2@32.486,63.439 C36.1@30.196,63.439
UP7: C37.1 C38.2 HV_Conn.7 R9.2 | length 16.6
  Top w0.127: 29.25,65.525 cw(c29.793,66.068) 29.025,66.068 29.025,67.35 cw(c30.876,67.35) 29.567,68.659 HV_Conn.7@30.316,69.408
  Top w0.3: 29.25,65.525 ccw(c30.278,66.553) 30.278,65.099 32.856,65.099 cw(c32.856,63.483) 33.999,64.626 C37.1@35.186,63.439 ; R9.2@33.584,60.758 33.584,60.785 cw(c36.124,60.785) 34.328,62.581 C37.1@35.186,63.439 ; C38.2@37.475,63.439 C37.1@35.186,63.439
UP8: C38.1 C39.2 HV_Conn.8 R9.1 | length 29
  Top w0.3: R9.1@38.375,60.758 cw(c40.503,60.758) 38.999,62.262 C38.1@40.175,63.439 40.175,67.944 ccw(c39.919,67.944) v2(40.1,68.125)
  Signal Layer 1 w0.3: HV_Conn.8@30.316,66.868 31.615,65.569 ccw(c33.411,67.365) 33.411,64.825 37.073,64.825 ccw(c37.073,67.365) 38.869,65.569 39.356,66.056 ccw(c37.56,67.852) 40.1,67.852 v2(40.1,68.125)
  Bottom w0.127: 27.232,64.836 ccw(c27.232,67.376) 29.028,65.58 HV_Conn.8@30.316,66.868
  Bottom w0.3: C39.2@22.997,63.439 23.65,64.092 cw(c25.446,62.296) 25.446,64.836 27.232,64.836
UP9: C39.1 C40.2 HV_Conn.9 R10.1 | length 13.8
  Bottom w0.127: 30.717,65.343 ccw(c30.158,66.518) 31.078,65.598 ccw(c29.852,66.824) 31.586,66.824 31.586,67.086 cw(c34.126,67.086) 32.33,68.882 HV_Conn.9@32.856,69.408
  Bottom w0.3: R10.1@24.035,60.758 24.977,61.7 ccw(c23.238,63.439) C39.1@25.697,63.439 C40.2@27.823,63.439 ccw(c27.823,64.081) 28.277,63.627 29.481,64.831 cw(c30.717,63.595) 30.059,65.214 cw(c30.717,63.595) 30.717,65.343
UP10: C40.1 C41.2 HV_Conn.10 R10.2 | length 8.9
  Bottom w0.127: C41.2@32.856,63.939 HV_Conn.10@32.856,66.868
  Bottom w0.3: R10.2@28.826,60.758 29.827,61.758 ccw(c28.147,63.439) C40.1@30.523,63.439 C41.2@32.649,63.439 ccw(c32.149,63.939) C41.2@32.856,63.939
UP11: C41.1 C42.2 HV_Conn.11 R10.3 | length 12.2
  Bottom w0.127: C41.1@35.194,63.594 34.801,63.987 cw(c36.427,65.612) 34.128,65.612 34.128,67.401 cw(c35.912,67.401) 34.651,68.662 HV_Conn.11@35.396,69.408
  Bottom w0.3: R10.3@33.618,60.758 34.677,61.817 ccw(c33.055,63.439) C41.1@35.349,63.439 ; C41.1@35.194,63.594 C41.1@35.349,63.439 ; C42.2@37.475,63.439 C41.1@35.349,63.439
UP12: C42.1 HV_Conn.12 P2.1 R10.4 | length 18.1
  Bottom w0.127: HV_Conn.12@35.777,66.846 37.16,66.846 cw(c37.16,64.306) 38.956,66.102 39.431,65.627 cw(c37.635,63.831) C42.1@40.175,63.831
  Bottom w0.3: C42.1@40.175,63.831 C42.1@40.175,63.439 cw(c37.964,63.439) 39.528,61.876 R10.4@38.41,60.758 38.41,58.542 ccw(c40.95,58.542) 39.154,56.746 40.166,55.734 ccw(c41.962,57.53) 41.962,54.99 P2.1@42.7,54.99
V_IN: Batt.1 C56.1 C62.1 C72.1 C76.1 U8.4 U8.5 U8.6 U10.1 U10.3 U12.4 U12.5 U13.4 U13.5 | length 80.1
  Bottom w0.3: 1.225,26.675 1.925,27.375 1.925,31.828 1.6,32.153 U8.4@1.6,32.175 ; 13.2,25.025 C62.1@13.2,23.6 13.425,23.375 U10.1@14.925,23.375 14.925,24 15.35,24.425 16.6,24.425 16.825,24.2 U10.3@16.825,23.375
  Bottom w0.5: 1.225,26.6 1.225,25.875 2.3,24.8 12.5,24.8 12.725,25.025 13.2,25.025 19.55,25.025 23.8,20.775 23.8,17.118 27.228,13.69 40.925,13.69 ; C72.1@38.65,5.85 39.15,5.85 40.925,7.625 40.925,13.69 ; C76.1@39.225,21.475 43.325,17.375 Batt.1@43.325,16.09 40.925,13.69
VDIGISENSCAN: U2.1 U11.33 | length 38.8
  Top w0.3: U11.33@8.346,15.7 8.346,13.355 v2(8.425,13.276)
  Signal Layer 1 w0.3: v2(1.325,40.475) 1.325,39.152 4.052,36.425 4.052,32.761 4.05,32.759 4.05,17.775 8.425,13.4 v2(8.425,13.276)
  Bottom w0.2: v2(1.325,40.475) 4.525,40.475 5.85,41.8 U2.1@7.025,41.8
VDIGISETCANCLK: R6.5 U11.41 | length 56.4
  Top w0.3: v2(5.025,8.5) 5.075,8.45 U11.41@6.696,8.45
  Signal Layer 2 w0.3: v2(5.025,8.5) 5.977,7.548 19.848,7.548 25.725,13.425 25.725,20.1 v2(27.7,22.075)
  Bottom w0.3: R6.5@13.125,30.2 14.642,30.2 17.092,32.65 20.108,32.65 23.754,29.004 23.754,26.021 v2(27.7,22.075)
VDIGISETCANCS: R6.7 U11.39 | length 47.9
  Top w0.3: U11.39@6.696,10.05 7.968,10.05 8.225,10.307 v2(8.225,10.611)
  Signal Layer 2 w0.3: v2(8.225,10.611) 8.786,10.05 19.6,10.05 23.825,14.275 23.825,19.65 25.275,21.1 v2(25.275,21.4)
  Bottom w0.3: R6.7@13.125,28.6 14.25,28.6 17.425,31.775 19.775,31.775 22.9,28.65 22.9,24.025 25.275,21.65 v2(25.275,21.4)
VDIGISETCANDIN: R6.6 U11.40 | length 50
  Top w0.3: U11.40@6.696,9.25 7.625,9.25 v2(8.025,8.85)
  Signal Layer 2 w0.3: v2@7.975,8.85 v2(8.025,8.85) 8.277,9.102 20.002,9.102 24.825,13.925 24.825,19.851 26.376,21.402 v2(26.376,21.901)
  Bottom w0.3: R6.6@13.125,29.4 14.446,29.4 17.248,32.202 19.952,32.202 23.327,28.827 23.327,24.95 v2(26.376,21.901)
VSENS: R7.2 R34.1 U2.3 U3.1 | length 14.1
  Bottom w0.3: U2.3@8.925,41.8 9.07,41.655 11.775,41.655 11.775,39.325 12.675,38.425 U3.1@13.875,38.425 14.525,38.425 15.25,39.15 16.917,39.15 17.867,38.2 R7.2@19.55,38.2
pads on no net: R6.4 R6.8 U1.4 U4.4 U4.8 U6.7 U11.1 U11.7 U11.8 U11.12 U11.13 U11.14 U11.16 U11.18 U11.19 U11.20 U11.21 U11.22 U11.23 U11.27 U11.28 U11.29 U11.30 U11.34 U11.37 U11.38 U11.42 U11.44 U12.6 U12.7 U13.6 U13.7
copper on no net:
  other v7: 0,0 45.025,0.075 45.025,68.875
  other v9: 0,68.85

## Polygon pours and split planes (outlines as drawn)
AGND on Signal Layer 2 "AGND_L03_P063" (solid, pour order 63): 18.175,29.275 23.725,23.725 23.725,15.1 19.5,15.1 18.475,16.125 18.475,21.05 11.575,27.95
GND on Signal Layer 2 "GND_L03_P135" (solid, pour order 135): 47.797,22.6 -2.375,22.6 -3.325,21.65 -3.325,-2.95 47.15,-2.95 47.875,-2.225
+5ANALOG on Signal Layer 2 "+5A" (solid, pour order 65): -2.75,46.225 2.95,46.225 2.95,34.185 2.95,22.257 -2.75,22.257
NEGATIVE_V on Signal Layer 2 "+5A" (solid, pour order 67): 2.655,66.725 -2.825,66.725 -2.825,61.105 -2.825,56.95 2.719,56.95
+2.5ANALOG on Signal Layer 2 "+2.5" (solid, pour order 71): -3.05,56.75 1.951,56.75 1.951,46.35 -3.05,46.35
AGND on Signal Layer 2 "Top Layer-No Net" (solid, pour order 80): 18.975,68.725 2.975,68.725 2.975,47.675 2.975,47.725 18.975,47.725
AGND on Signal Layer 2 "Top Layer-No Net" (solid, pour order 81): 18.95,47.3 2.95,47.3 2.95,26.275 18.95,26.275 18.95,47.3
AGND on Signal Layer 2 "Top Layer-No Net" (solid, pour order 89): 18.375,42.275 20.284,42.275 cw(c20.284,40.909) 21.25,41.875 21.25,39.616 cw(c19.884,39.616) 20.85,38.65 cw(c20.609,38.891) 20.609,38.55 17.8,38.55
AGND on Signal Layer 2 "Top Layer-No Net" (solid, pour order 93): 3.375,62.375 -2.454,62.375 ccw(c-2.454,62.204) -2.575,62.325 -2.575,24.375 3.704,24.375
NEGATIVE_V on Signal Layer 2 "NEGATIVE_V_L03_P060" (solid, pour order 60): 42.129,21.473 29.298,21.473 29.1,21.275 29.1,17.875 29.95,17.025 29.975,17 42.275,17
AGND on Bottom "AGND_L04_P059" (solid, pour order 59): 18.475,16.075 19.475,15.075 24.075,15.075 24.075,15.325 24.625,15.875 23.375,17.125 23.375,20.75 23.176,20.75 19.36,24.566 19.251,24.675 18.225,24.675 18.225,21.275 18.5,21
GND on Bottom "GND_L04_P139" (solid, pour order 139): 47.946,30.9 -3.15,30.9 -3.15,-3.075 47.325,-3.075 48.05,-2.35
GND on Bottom "GND_L04_P129" (solid, pour order 129): 18.85,25.45 4.175,25.45 2.4,23.675 2.4,14.075 3.25,13.225 17.85,13.225 18.35,13.725 18.875,14.25 18.875,25.5
GND on Bottom "Top Layer-No Net" (solid, pour order 117): -2.975,58.35 2.5,58.35 2.775,58.625 2.575,58.825 2.575,67.25 -3,67.25 -3.1,67.35
GND on Bottom "Top Layer-No Net" (solid, pour order 109): -2.475,33.275 -2.45,33.25 1.875,33.25 1.875,52.775 1.875,59.1 1.25,59.725 1.225,59.75 -3.05,59.75 -3.05,33.2
GND on Bottom "Top Layer-No Net" (solid, pour order 95): -3.05,35 2.35,35 2.675,34.675 2.675,30.5 2.675,28.875 2.675,24.975 -1.375,24.975 -3.05,24.975
AGND on Bottom "Top Layer-No Net" (solid, pour order 77): 3,68.675 3,47.675 19,47.675 18.925,47.675 18.925,68.675 16.125,68.675 16.125,61.475 10.65,61.475 10.65,68.725
AGND on Bottom "Top Layer-No Net" (solid, pour order 83): 18.925,47.275 2.95,47.275 2.95,26.225 18.975,26.225
NEGATIVE_V on Top "NEGATIVE_V_L01_P062" (solid, pour order 62): 42.129,21.473 29.298,21.473 29.1,21.275 29.1,17.875 29.95,17.025 29.975,17 42.275,17
GND on Top "GND_L01_P131" (solid, pour order 131): 47.975,21.6 -3.075,21.6 -3.15,21.525 -3.15,-3.075 47.325,-3.075 48.05,-2.35
AGND on Top "+5A" (solid, pour order 123): 10.864,66.815 4.405,64.947 3.303,64.947 2.303,65.947 2.028,66.222 2.028,68.85 10.864,68.85
+5ANALOG on Top "+5A" (solid, pour order 70): -2.575,46.95 2.3,46.95 2.3,22.338 -2.575,22.338
+2.5ANALOG on Top "+2.5" (solid, pour order 74): -2.873,56.975 2.525,56.975 2.525,47 -2.745,47
AGND on Top "Top Layer-No Net" (solid, pour order 119): 2.225,46.925 -1.556,46.925 -1.556,38.268 -1.556,37.781 -0.45,36.675 -0.225,36.9 2.4,36.9 2.4,45.75 2.225,46.675
AGND on Top "Top Layer-No Net" (solid, pour order 85): 18.775,57.725 3.025,57.725 3.025,46.6 18.825,46.6 18.825,46.675
GND on Top "Top Layer-No Net" (solid, pour order 87): -2.698,66.75 2.425,66.75 2.425,52.625 0.45,52.425 -1.467,49.763 -1.668,38.229 -0.625,36.739 2.425,36.739 2.597,30.875 -2.9,30.875
AGND on Signal Layer 1 "AGND_L02_P064" (solid, pour order 64): 18.175,29.275 23.725,23.725 23.725,15.175 18.475,15.175 18.475,16.05 18.475,21.05 11.575,27.95
GND on Signal Layer 1 "GND_L02_P133" (solid, pour order 133): 47.972,22.425 -2.25,22.425 -3.15,21.525 -3.15,-3.075 47.325,-3.075 48.05,-2.35
AGND on Signal Layer 1 "Top Layer-No Net" (solid, pour order 111): 18.85,29.65 18.85,23.474 -1.402,23.474 -1.35,29.65 -1.201,47.464 -1.201,50.277 0.618,52.096 3.346,52.096 3.45,52.2 3.45,68.625 18.85,68.625 18.85,48.474
+5ANALOG on Signal Layer 1 "+5A" (solid, pour order 66): -2.595,36.625 0.65,36.625 2.325,34.95 2.325,22.325 -2.529,22.325
NEGATIVE_V on Signal Layer 1 "GND" (solid, pour order 68): 2.84,66.725 -1.672,66.725 -1.672,56.4 2.979,56.4
GND on Signal Layer 1 "+2.5" (solid, pour order 75): -1.159,57.468 2.3,57.468 2.3,50.975 -0.55,48.125 -1.159,48.125
GND on Signal Layer 1 "Top Layer-No Net" (solid, pour order 121): -2.975,66.775 -2.9,66.7 2.275,66.7 2.275,53.5 1.175,52.4 -1.201,50.024 -1.201,49.689 -1.201,38.376 1.725,35.45 2.3,34.875 2.3,24.825 -1.35,24.825 -3.025,26.5
NEGATIVE_V on Signal Layer 1 "NEGATIVE_V_L02_P061" (solid, pour order 61): 42.129,21.473 29.298,21.473 29.1,21.275 29.1,17.875 29.95,17.025 29.975,17 42.275,17

## Keep-outs
Keep-Out Layer:
  lines w0.1: -3,70.78 cw(c-1.68,70.78) -1.68,72.1 ; -3,70.805 -3,-1.88 ccw(c-1.68,-1.88) -1.68,-3.2 46.725,-3.2 ; -1.705,72.1 46.68,72.1 cw(c46.68,70.779) 48,70.779 48,-1.925 ; 46.68,-3.201 ccw(c46.68,-1.88) 48,-1.88

## Other copper
Top:
  pour cut-out: 17.55,21.575 18.05,21.075 18.05,16.325 19.5,14.875 23.85,14.875 24.65,15.675 24.65,21.725
Signal Layer 1:
  pour cut-out: 11.475,71.875 11.475,61.375 12.525,60.325 12.625,60.425 15.325,60.425 15.325,65.6 13.875,67.05 13.875,71.75
Signal Layer 2:
  pour cut-out: 11.475,71.875 11.475,61.375 12.525,60.325 12.625,60.425 15.375,60.425 15.375,65.55 13.875,67.05 13.875,71.75
Bottom:
  region net 3.3V: 28.875,0 28.875,1.175 33.175,5.475 34.625,5.475 34.625,6.275 34.65,6.3 28.375,6.3 26.2,4.125 26.2,0.9 27.075,0.025
  region net NetC71_2: 35.45,6.05 35.45,7.475 32.975,9.95 27.475,9.95 26.725,10.7 26.725,12.6 27.1,12.975 35.625,12.975 36.75,11.85 36.75,7.225 36.175,6.65 36.125,6.65 35.7,6.225 35.7,6.05
  region net GND: 35.925,5.25 33.4,5.25 29.8,1.65 29.8,0.2 30.225,-0.225 31.475,-0.225 32,0.3 32,2.1 32.75,2.1 34.275,3.625 35.525,3.625
  region net GND: 35.55,5.275 37.425,5.275 38.35,4.35 39.8,4.35 39.8,2.6 39.625,2.425 37.825,2.425 37.6,2.65 37.6,2.775 36.75,3.625 35.525,3.625
  region net V_IN: 35.975,6.225 36.175,6.425 39.6,6.425 39.6,5.225 39.575,5.2 37.9,5.2 37.575,5.525 35.975,5.525
  region net NetC75_2: 36,21.725 36,23.15 33.525,25.625 28.025,25.625 27.275,26.375 27.275,28.275 27.65,28.65 36.175,28.65 37.3,27.525 37.3,22.9 36.725,22.325 36.675,22.325 36.25,21.9 36.25,21.725
  region net GND: 29.525,15.7 29.525,16.875 33.825,21.175 35.275,21.175 35.275,21.975 35.3,22 29.025,22 26.85,19.825 26.85,16.6 27.725,15.725
  region net NEGATIVE_V: 36.575,20.95 34.05,20.95 30.45,17.35 30.45,15.9 30.875,15.475 32.125,15.475 32.65,16 32.65,17.8 33.4,17.8 34.925,19.325 36.175,19.325
  region net V_IN: 36.525,21.9 36.725,22.1 40.15,22.1 40.15,20.9 40.125,20.875 38.45,20.875 38.125,21.2 36.525,21.2
  pour cut-out: 20.7,41.88 15.443,41.88 ccw(c15.443,41.112) 14.9,41.655 14.9,39.115 20.7,39.115
  pour cut-out: 19.285,36.625 18.35,36.625 cw(c18.572,38.429) 17.139,37.311 18.445,38.161 cw(c19.384,37.222) 19.384,38.55

## Silkscreen, mask and mechanical layers (free items; w line width, h text height)
Top Overlay:
  text "DANGER High voltage" at 46.975,39.2 h3 r90
  text "+" at 40.575,15.9 h2
  text "-" at 40.85,12.7 h2
  text "1 - MCU3 / 2 - MCU1 / 3 - MCU2 / 4 - ADC_Start / 5 - +3.3 / 6 - TDI / 7 - GND / 8 - TMS / 9 - TDO / 10 - TCK" at 24.975,-1.775 h2
Bottom Overlay:
  text "DANGER High voltage" at 45.15,39.5 h3 r270
  text "The Scalpel Concept" at 46.125,32.55 h3
  text "Signal shaper board" at 44.9,30.275 h2
  text "v.1.1" at 45.55,25.175 h2 r270
  text "ООО 'Микрон Сервис' / г.Тула, 2017г." at 17.575,4.025 h2
Bottom Solder:
  rectangle: 12.05,62.067 15.075,66.592
  rectangle: 14.9,39.225 20.75,41.625
  rectangle: 11.425,66.325 13.8,72.25
  rectangle: 18.25,37.075 21.125,39.425

## Text inside footprints (layer, text, board x,y; h text height)
HV_Conn: Bottom Overlay "12" at 37.428,67.376 h1.27 r180; Bottom Overlay "1" at 38.444,69.916 h1.27 r180; Bottom Overlay "1" at 37.428,69.916 h1.27 r180; Bottom Overlay "1" at 19.648,69.916 h1.27 r180; Bottom Overlay "2" at 19.648,67.376 h1.27 r180
Iface: Top Overlay "10" at 20.104,1.317 h1.27; Top Overlay "9" at 20.104,-1.223 h1.27; Top Overlay "1" at 6.388,-1.223 h1.27; Top Overlay "2" at 5.88,1.317 h1.27